# Altium PCB chipshouter-pico.PcbDoc (part 2 of 2)
Units mm, origin at the board's own origin, x right, y up, seen from the top; angles counter-clockwise.
Board outline 40 x 116 mm, 2 copper layers (Top Layer, Bottom Layer); 44 components, 36 nets, 230 pads, 5 vias.
Unrouted connection lines stored in the file: 2.
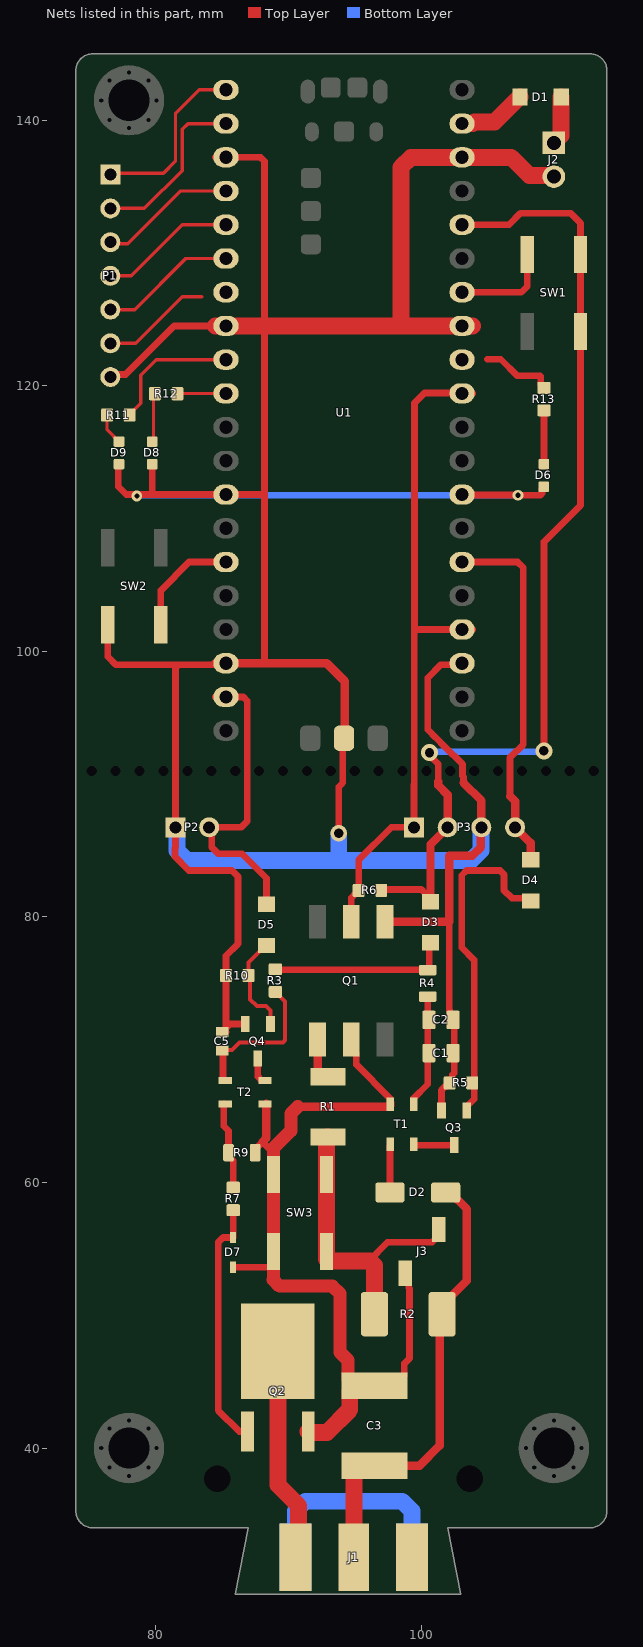
[diagram p2: the nets of this part, all layers, seen from the top]

## Part data
C1 C2: library part CCHIP-4u7-0805-50V, "4u7, 50V, 0805, Ceramic", Case-EIA=0805, Case-Metric=1608, Manufacture 1="TDK Corporation", Manufacture Part Number 1=C2012X5R1H475K125AB, Rated Voltage=50VDC, Supplier Part Number 1=445-5980-1-ND, Temperature Range="-55C to 85C", Tolerance=10%, Component Group=Capacitor, Component Type=Standard, Mounting Technology=SMT, Part Number=CCHIP-4u7-0805-50V, Pin Count=2, RoHS=Yes, Supplier 1=Digi-Key
C3: library part CKG57NX7T2J105M500JH, "1uF, 630V, X7T, Stacked", Case-EIA=2220, Case-Metric=5750, Manufacture 1="TDK Corporation", Manufacture Part Number 1=KRM55TR72J474MH01K, Rated Voltage=630V, Supplier Part Number 1=445-7110-1-ND, Tolerance=+22/-30, Component Group=Capacitor, Component Type=Standard, ComponentLink1Description="Tech Spec Page", ComponentLink1URL=https://product.tdk.com/en/search/capacitor/ceramic/mlcc/info?part_no=CKG57NX7T2J105M500JJ, Part Number=KRM55TR72J474MH01K, Pin Count=2, Supplier 1=Digi-Key
C5: library part CCHIP-100n-0603, "100n, 0603", Case-EIA=0603, Case-Metric=1608, Manufacture 1=Kemet, Manufacture Part Number 1=C0603C104K5RACTU, Rated Voltage=50VDC, Supplier Part Number 1=399-5089-2-ND, Component Group=Capacitor, Component Type=Standard, Mounting Technology=SMT, Part Number=CCHIP-100n-0603, Pin Count=2, Supplier 1=Digi-Key
D1 D3 D4 D5: "SCHOTTKY 30V SOD-123FL", Manufacture 1="SMC Diode Solutions", Supplier Part Number 1=1655-1926-1-ND, Component Group=Diode, Component Type=Standard, Manufacture Part Number 1=DSS13UTR, Mounting Technology=SMT, Part Number=DSS13UTR, Pin Count=2, PP Material Stack=0, PP Rotation=0, RoHS=Yes, Supplier 1=Digi-Key
D2: "600V, 2A, Fast Recovery Diode", Manufacture 1="On Semi", Rated Power=2A, Rated Voltage=600V, Supplier Part Number 1=MURA160T3GOSCT-ND, Temperature Range="-65C to 175C", Component Group=Diode, Component Type=Standard, Manufacture Part Number 1=MURA160T3G, Mounting Technology=SMT, Part Number=MURA160T3G, Pin Count=2, RoHS=Yes, Supplier 1=Digi-Key
D6 D9: library part LEDCHIP_0603_RED, "Chip LED, Red", Manufacture 1=Kingbright, Manufacture Part Number 1=APT1608SRCPRV, Supplier Part Number 1=754-1122-1-ND, Component Group=Optical, Component Type=Standard, Mounting Technology=SMT, Part Number=LEDCHIP_0603_RED, Pin Count=2, PP Material Stack=15, PP Rotation=-90, Supplier 1=Digi-Key
D7: library part PDZ10B, "DIODE ZENER 10V 400MW SOD323", Manufacture 1="On Semiconductor", Rated Power=0.4W, Rated Voltage=10V, Tolerance=2%, Component Group=Diode, Component Type=Standard, Manufacture Part Number 1=MM3Z18VB, Mounting Technology=SMT, Part Number=MM3Z18VB, Pin Count=2, PP Material Stack=0, PP Rotation=0, RoHS=Yes, Supplier 1=Digi-Key, Supplier 2=Mouser, Supplier Part Number 2=771-PDZ10B115
D8: library part LEDCHIP_0603_GREEN, "Chip LED, Green", Manufacture 1=Kingbright, Manufacture Part Number 1=APT1608CGCK, Supplier Part Number 1=754-1116-1-ND, Component Group=Optical, Component Type=Standard, Mounting Technology=SMT, Part Number=LEDCHIP_0603_GREEN, Pin Count=2, PP Material Stack=16, PP Rotation=-90, Supplier 1=Digi-Key
J1: library part CON-F-SMA-PCBEDGE-003.062, "SMA MaleEdge Mount Connector for 0.062\" Thick Board", Manufacture 1="Linx Technologies", Manufacture Part Number 1=CONSMA013.062, Supplier Part Number 1=CONSMA013.062-ND, Component Group=Connector, Component Type=Standard, ComponentLink1Description="Manufacturer URL", ComponentLink1URL=http://www.linxtechnologies.com/, ComponentLink2Description=Datasheet, ComponentLink2URL=http://www.connectorcity.com/diagrams/SMA/CONSMA003.062.pdf, Part Number=CON-F-SMA-PCBEDGE-003.062, Pin Count=5, Supplier 1=Digi-Key
J2: library part Molex_2_Pin, "CONN HEADER 2POS .100 VERT TIN", Manufacture 1=Molex, Manufacture Part Number 1="22-23-2021 / 22-23-2021", Supplier Part Number 1=WM4200-ND, Component Group=Connector, Component Type=Standard, Mounting Technology=Through-hole, Part Number=Molex_2_Pin, Pin Count=2, PP Material Stack=0, PP Rotation=0, RoHS=Yes, Supplier 1=Digi-Key
J3: "2-Pin SMD, Female Header, 0.1\" spacing", Manufacture 1=GCT, Component Group=Connector, Component Type=Standard, Manufacture Part Number 1=BG306-02-A-2-0400-L-G, Part Number=BG306-02-A-2-0400-L-G, Pin Count=2, PP Material Stack=0, PP Rotation=0, PP Rotation1=0, Supplier 1=Digi-Key
MH1 MH2 MH3: library part MOUNT_M3_TIGHT, "Machine screw M3 Mounting Hole", Component Group=Mechanical, Component Type=Mechanical, Part Number=MOUNT_M3_TIGHT, Pin Count=1, PP Material Stack=0, PP Rotation=0
P1: "Header, 7-Pin", LatestRevisionDate=17-Jul-2002, LatestRevisionNote="Re-released for DXP Platform.", Publisher="Altium Limited"
P2: "Header, 2-Pin", LatestRevisionDate=17-Jul-2002, LatestRevisionNote="Re-released for DXP Platform.", Publisher="Altium Limited"
P3: "Header, 4-Pin", LatestRevisionDate=17-Jul-2002, LatestRevisionNote="Re-released for DXP Platform.", Publisher="Altium Limited"
Q1: "Phototransistor", Manufacturer_Name="IXYS SEMICONDUCTOR", Mouser Part Number=849-LDA111STR, Arrow Part Number=LDA111STR, Arrow Price/Stock=https://www.arrow.com/en/products/lda111str/ixys, Datasheet Link=https://datasheet.datasheetarchive.com/originals/dk/DKDS-13/255385.pdf, Height=4.699mm, Manufacturer_Part_Number=LDA111STR, Mouser Price/Stock=https://www.mouser.co.uk/ProductDetail/IXYS-Integrated-Circuits/LDA111STR?qs=lQlU%252BwB40guZJ8WaenQLCg%3D%3D
Q2: library part IRLR120TRPBF, "MOSFET N-CH 100V 7.7A DPAK", Manufacture 1="Vishay Siliconix", Rated Voltage=100V, Supplier Part Number 1=IRLR120TRPBFCT-ND, Component Group=MOSFET, Component Type=Standard, Manufacture Part Number 1=IRLR120TRPBF, Mounting Technology=SMT, Part Number=IRLR120TRPBF, Pin Count=3, RoHS=Yes, Supplier 1=Digi-Key
Q3 Q4: library part DMN3200U-7, "MOSFET N-CH 30V 2.2A SOT23-3", Manufacture 1="Diodes Inc.", Rated Power=3A, Rated Voltage=30V, Supplier Part Number 1=DMN3200U-7DICT-ND, Component Group=MOSFET, Component Type=Standard, Manufacture Part Number 1=DMN3200U-7, Mounting Technology=SMT, Part Number=DMN3200U-7, Pin Count=3, PP Material Stack=0, PP Rotation=0, RoHS=Yes, Supplier 1=Digi-Key
R1: library part RCHIP-20M-2010, "20M, 2010, 1%", Case-EIA=2010, Case-Metric=5025, Manufacture 1=Vishay, Manufacture Part Number 1=CRMA2010AF20M0FKEF, Rated Power=0.5W, Rated Voltage=400VDC, Temperature Range="-55C to 155C", Tolerance=1%, Component Group=Resistor, Component Type=Standard, Mounting Technology=SMT, Part Number=RCHIP-20M-2010, Pin Count=2, Supplier 1=Digi-Key
R2: library part RCHIP-300K-2512, "300K res, 2512, 1%, 3W", Case-EIA=2512, Case-Metric=6432, Manufacture 1="TE Connectivity", Manufacture Part Number 1=3522300KFT, Rated Power=3W, Rated Voltage=250V, Supplier Part Number 1=A121215CT-ND, Temperature Range="-55C to 155C", Tolerance=1%, Component Group=Resistor, Component Type=Standard, Mounting Technology=SMT, Part Number=RCHIP-300K-2512, Pin Count=2, RoHS=Yes, Supplier 1=Digi-Key
R3 R7: library part RCHIP-10R-0603, "10R res, 0603, 1%, 1/10W", Case-EIA=0603, Case-Metric=1608, Manufacture 1=Yageo, Manufacture Part Number 1=RC0603FR-0710RL, Rated Power=0.1W, Rated Voltage=75VDC, Supplier Part Number 1=311-10.0HRCT-ND, Temperature Range="-55C to 155C", Tolerance=1%, Component Group=Resistor, Component Type=Standard, Mounting Technology=SMT, Part Number=RCHIP-10R-0603, Pin Count=2, Supplier 1=Digi-Key
R4: library part RCHIP-75R-0805, "75R res, 0805, 1%, 1/8W", Case-EIA=0805, Manufacture 1=Yageo, Manufacture Part Number 1=RC0805FR-0775RL, Rated Power=0.125W, Rated Voltage=75VDC, Supplier Part Number 1=311-75.0CRCT-ND, Temperature Range="-55C to 155C", Tolerance=1%, Component Group=Resistor, Component Type=Standard, Mounting Technology=SMT, Part Number=RCHIP-75R-0805, Pin Count=2, Supplier 1=Digi-Key
R5 R10 R11 R12 R13: library part RCHIP-1K-0603, "1k res, 0603, 1%, 1/10W", Case-EIA=0603, Case-Metric=1608, Manufacture 1=Yageo, Manufacture Part Number 1=RC0603FR-071KL, Rated Power=0.1W, Rated Voltage=75VDC, Supplier Part Number 1=311-1.00KHRCT-ND, Temperature Range="-55C to 155C", Tolerance=1%, Component Group=Resistor, Component Type=Standard, Mounting Technology=SMT, Part Number=RCHIP-1K-0603, Pin Count=2, Supplier 1=Digi-Key
R6: library part RCHIP-22K-0603, "22k res, 0603, 1%, 1/10W", Case-EIA=0603, Case-Metric=1608, Manufacture 1=Yageo, Manufacture Part Number 1=RC0603FR-0722KL, Rated Power=0.1W, Rated Voltage=75VDC, Supplier Part Number 1=311-22.0KHRCT-ND, Temperature Range="-55C to 155C", Tolerance=1%, Component Group=Resistor, Component Type=Standard, Mounting Technology=SMT, Part Number=RCHIP-22K-0603, Pin Count=2, Supplier 1=Digi-Key
R9: library part RCHIP-75R-0805, Case-EIA=0805, Manufacture 1=Yageo, Manufacture Part Number 1=RC0805FR-0775RL, Rated Power=0.125W, Rated Voltage=75VDC, Supplier Part Number 1=311-75.0CRCT-ND, Temperature Range="-55C to 155C", Tolerance=1%, Component Group=Resistor, Component Type=Standard, Mounting Technology=SMT, Part Number=RCHIP-75R-0805, Pin Count=2, Supplier 1=Digi-Key
SW1 SW2 SW3: library part TACTSW-KSC741J, "SWITCH TACTILE SPST-NO 0.01A 32V", Manufacture 1=C&K, Supplier Part Number 1=CKN10309CT-ND, Component Group=Switch, Component Type=Standard, Manufacture Part Number 1="KSC741J LFS", Mounting Technology=SMT, Part Number=TACTSW-KSC741J, Pin Count=4, PP Material Stack=0, PP Rotation=0, RoHS=Yes, Supplier 1=Digi-Key
T1 T2: library part ATB322524_PROTO, "HV Transformer 1:10, Small", Manufacture 1=TDK, Component Group=Inductor, Component Type=Standard, Manufacture Part Number 1=ATB322524, Mounting Technology=SMT, Part Number=ATB322524_PROTO, Pin Count=4, RoHS=Yes, Supplier 1=Mouser
U1: "Raspberry Pi Pico", Package=None, Availability="In Stock", Check_prices=https://www.snapeda.com/parts/SC0915/Raspberry%20Pi/view-part/6331605/?ref=eda, Component Group="PCB Feature", Component Type=Standard, MF="Raspberry Pi", MP=SC0915, Part Number=SC0915, PP Material Stack=0, PP Rotation=0, PP Rotation1=0, Price=None, Purchase-URL=https://pricing.snapeda.com/search/part/SC0915/?ref=eda, SnapEDA_Link=https://www.snapeda.com/parts/SC0915/Raspberry%20Pi/view-part/6331605/?ref=snap

## Free pads (board coordinates)
  round 0 hole 2 unplated: 8(84.651,37.7) 9(103.65,37.7)
  round 0 hole 0.762 unplated: 10(75.2,91) 10(77,91) 10(78.8,91) 10(80.6,91) 10(82.4,91) 10(84.2,91) 10(86,91) 10(87.8,91) 10(89.6,91) 10(91.4,91) 10(93.2,91) 10(95,91) 10(96.8,91) 10(98.6,91) 10(100.4,91) 10(102.2,91) 10(104,91) 10(105.8,91) 10(107.6,91) 10(109.4,91) 10(111.2,91) 10(113,91)

## Via types
v1: diameter 1.27, hole 0.711, Top Layer to Bottom Layer, tented both sides, 3 vias
v2: diameter 0.8, hole 0.4, Top Layer to Bottom Layer, tented both sides, 2 vias

## Nets (pads, with @x,y where several pads share a name; then routed paths per layer and width w, separated by ;. In a path a pad name is that pad's centre, name@x,y a point inside that pad or via, vN(x,y) a via of type N, cw(c..) or ccw(c..) an arc to the next point about the centre after c; other vN are vias at no path point)
CHARGED: P3.1 Q1.5 R6.2 U1.24 U1.31 | length 50.7
  Top Layer w0.508: Q1.5@94.742,79.629 94.742,81.442 R6.2@95.054,81.754 ; R6.2@95.3,82 95.3,84.3 97.75,86.75 P3.1@99.46,86.75 99.46,89.967 99.489,89.997 99.489,101.647 U1.24@103.886,101.647 ; 99.5,101.75 99.5,118.699 100.254,119.452 103.861,119.452 U1.31@103.886,119.427
GND: C1.2 C2.2 C5.2 D6.K D8.K D9.K J2.2 P1.7 P2.1 P3.3 Q1.4 Q3.2 Q4.2 R5.2 R10.2 SW2.1 U1.3 U1.8 U1.13 U1.18 U1.23 U1.28 U1.33 U1.38 U1.D2 | length 286.5
  Top Layer w0.508: SW2.1@76.4,102 76.406,101.994 76.406,99.594 77,99 81.75,99 ; P1.7@76.6,120.66 76.79,120.85 77.75,120.85 81.407,124.507 U1.8@84.506,124.507 ; D9.K@77.25,114.1 77.2,114.05 77.2,112.4 77.793,111.807 79.8,111.807 ; D8.K@79.75,114.1 79.75,111.857 79.8,111.807 ; U1.18@84.506,99.107 84.399,99 81.75,99 ; U1.3@84.506,137.207 87.902,137.207 88.2,136.909 88.2,124.507 ; C5.2@85.014,71.337 C5.2@85.307,71.337 ; Q4.2@86.756,71.937 85.614,71.937 85.307,71.63 R10.2@85.307,75.59 85.307,77.077 86.208,77.978 86.208,83.042 85.75,83.5 82.5,83.5 81.46,84.54 81.46,85.198 81.5,85.238 P2.1@81.5,86.75 81.5,98.75 81.75,99 ; 88.2,99.107 88.2,111.807 ; 88.2,124.21 88.2,111.807 ; v1(93.8,86.3) 93.8,89.8 94.1,90.1 94.1,93.361 U1.D2@94.196,93.457 ; Q3.2@101.539,65.435 101.539,66.956 101.837,67.254 101.954,67.254 101.975,67.275 101.975,67.725 102.325,67.725 102.346,67.746 102.346,68.096 102.5,68.25 102.5,72.25 102.154,72.596 102.154,72.969 102.129,72.994 102.129,79.629 ; U1.23@102.445,99 101.5,99 100.5,98 100.5,94.116 101.101,93.516 101.105,93.516 101.775,92.846 101.775,92.841 103.111,91.505 103.111,90.632 103.2,90.543 103.2,90.1 ; U1.28@103.886,111.807 103.915,111.778 107.271,111.778 v2(107.3,111.75) ; 105,111.75 v2(107.3,111.75) ; D6.K@109.25,112.4 109.104,112.254 109.104,111.902 108.952,111.75 v2(107.3,111.75) ; 79.8,111.807 84.506,111.807 88.2,111.807
  Top Layer w0.635: U1.18@84.506,99.107 88.2,99.107 92.893,99.107 94.25,97.75 94.25,93.511 U1.D2@94.196,93.457 ; Q1.4@97.282,79.629 102.129,79.629 102.129,84.621 103.871,84.621 104.5,85.25 104.5,86.71 P3.3@104.54,86.75 104.54,88.76 103.2,90.1
  Top Layer w1.27: U1.8@84.506,124.507 88.2,124.507 98.593,124.507 ; U1.33@103.886,124.507 98.593,124.507 ; J2.2@110,135.75 109.918,135.832 108.168,135.832 106.793,137.207 103.886,137.207 99.244,137.207 98.5,136.463 98.5,124.6 98.593,124.507
  Bottom Layer w0.508: v2(78.6,111.7) 78.65,111.75 v2(107.3,111.75)
  Bottom Layer w1.27: P2.1@81.5,86.75 81.615,86.635 81.615,84.994 82.359,84.25 93.8,84.25 ; v1(93.8,86.3) 93.8,84.25 ; P3.3@104.54,86.75 104.5,86.71 104.5,84.994 103.756,84.25 93.8,84.25
HVPULSE: D5.A P2.2 U1.19 | length 23.3
  Top Layer w0.508: U1.19@84.506,96.567 86.614,96.567 86.9,96.281 86.9,87.198 86.452,86.75 84.23,86.75 P2.2@84.04,86.75 84.23,86.56 84.23,85.27 84.75,84.75 86.533,84.75 88.367,82.917 D5.A@88.367,80.95
HVPWM: D4.A P3.4 U1.26 | length 27
  Top Layer w0.508: U1.26@103.886,106.727 107.273,106.727 107.7,106.3 107.7,93 106.7,92 106.7,89.1
  Top Layer w0.635: 106.7,89.1 107.08,88.72 P3.4@107.08,86.75 108.25,85.58 D4.A@108.25,84.3
NetC1_1: C1.1 C2.1 R4.2 T1.4 | length 8.5
  Top Layer w0.508: T1.4@99.437,65.989 99.437,66.339 100.5,67.402 100.5,69 100.5,71.25 100.5,72.25 R4.2@100.5,74
NetC3_1: C3.1 D2.K J1.1 R2.2 | length 34.8
  Top Layer w0.305: D2.K@101.448,58.848 D2.K@101.85,59.25
  Top Layer w0.635: C3.1@96.495,38.681 99.895,38.681 101.397,40.183 101.397,49.901 R2.2@101.585,50.089 101.585,50.739 103.454,52.608 103.454,57.996 102.2,59.25 D2.K@101.85,59.25
  Top Layer w1.27: J1.1@94.934,32.131 94.945,32.143 94.945,38.316 95.31,38.681 C3.1@96.495,38.681
NetC3_2: C3.2 D7.A J3.1 Q1.2 Q2.2 R9.2 SW3.1 SW3.4 T1.3 T2.2 | length 66.9
  Top Layer w0.508: D7.A@85.852,53.612 SW3.1@88.856,53.612 ; R9.2@87.5,62.25 87.5,62.5 88.065,63.065 88.635,62.495 88.635,60.855 SW3.4@88.881,60.609 ; Q1.2@94.742,70.124 95.123,69.743 95.123,68.883 97.667,66.339 T1.3@97.667,65.989 ; C3.2@96.495,44.681 97.995,44.681 98.741,45.427 98.741,46.366 99.136,46.761 99.136,51.994 99.062,52.068 99.062,52.908 J3.1@98.806,53.164
  Top Layer w0.635: 88.065,63.065 88.341,63.341 T2.2@88.341,65.917 ; 90.72,65.7 97.584,65.7 97.667,65.783 T1.3@97.667,65.989
  Top Layer w1: 90.72,65.7 90.2,65.18 90.2,63.9 88.881,62.581 SW3.4@88.881,60.609 SW3.1@88.881,54.809 88.881,52.698 88.856,52.673 89.329,52.2 93.314,52.2 93.9,51.614 93.9,47.2 94.495,46.605 94.495,45.181 94.995,44.681 C3.2@96.495,44.681
  Top Layer w1.27: Q2.2@91.491,41.25 91.567,41.173 92.913,41.173 94.63,42.89 94.63,44.316 C3.2@94.995,44.681
NetC5_1: C5.1 R3.2 T2.4 | length 11.4
  Top Layer w0.305: C5.1@85.014,69.937 85.067,69.991 85.767,69.991 86.312,70.536 89.585,70.536 89.764,70.714 89.764,73.623 89.375,74.012 89.375,74.062 89.077,74.359 R3.2@89.027,74.359
  Top Layer w0.508: C5.1@85.071,69.937 C5.1@85.014,69.937 85.077,69.874 85.077,67.751 T2.4@85.141,67.687
NetD1_A: D1.A J2.1 | length 3.9
  Top Layer w1.27: J2.1@109.83,138.12 J2.1@110,138.29 110.55,138.84 D1.A@110.55,141.75
NetD1_K: D1.K U1.39 | length 4.4
  Top Layer w1.27: U1.39@103.886,139.747 104.013,139.874 105.529,139.874 107.405,141.75 D1.K@107.45,141.75
NetD2_A: D2.A T1.2 | length 3.7
  Top Layer w0.508: D2.A@97.554,59.154 D2.A@97.65,59.25 97.667,59.267 T1.2@97.667,62.789
NetD3_K: D3.K R3.1 R4.1 | length 13.6
  Top Layer w0.508: R3.1@89.027,76.059 89.057,76.03 100.47,76.03 R4.1@100.5,76 100.605,76.105 100.605,77.947 D3.K@100.711,78.053
NetD4_K: D4.K Q3.1 R5.1 | length 25.7
  Top Layer w0.508: Q3.1@103.439,65.435 103.439,65.71 104,66.271 104,76.762 103.063,77.699 103.063,83.139 103.425,83.5 105.952,83.5 106.25,83.202 106.25,82 106.838,81.412 108.038,81.412 D4.K@108.25,81.2 108.175,81.2 D4.K@107.975,81
NetD5_K: D5.K Q4.1 R10.1 | length 7.6
  Top Layer w0.305: D5.K@88.367,77.85 88.292,77.85 87.007,76.566 R10.1@87.007,75.59 87.122,75.475 87.122,73.787 87.63,73.279 88.316,73.279 88.656,72.939 Q4.1@88.656,71.937
NetD6_A: D6.A R13.1 | length 4.1
  Top Layer w0.508: D6.A@109.25,114.1 R13.1@109.25,118.15
NetD7_K: D7.K Q2.1 R7.2 | length 18.9
  Top Layer w0.508: R7.2@85.852,57.914 D7.K@85.852,55.862 85.097,55.862 84.716,55.481 84.716,42.843 86.309,41.25 Q2.1@86.931,41.25
NetD8_A: D8.A R12.1 | length 3.7
  Top Layer w0.254: D8.A@79.75,115.8 79.85,115.9 79.85,119.3 R12.1@79.95,119.4
NetD9_A: D9.A R11.1 | length 2.4
  Top Layer w0.254: R11.1@76.3,117.75 R11.1@76.35,117.8 76.35,116.7 D9.A@77.25,115.8
NetJ1_2: J1.2 J1.3 J1.4 J1.5 Q2.3 | length 32.3
  Top Layer w1.27: Q2.3@89.211,47.3 89.211,37.23 90.78,35.662 90.78,32.36 J1.2@90.551,32.131
  Bottom Layer w1.27: J1.3@90.537,31.775 90.537,35.256 91.281,36 98.558,36 99.302,35.256 J1.4@99.302,31.775
NetJ3_2: J3.2 R1.2 R2.1 SW3.2 SW3.3 | length 28.2
  Top Layer w0.508: SW3.2@92.856,54.809 SW3.3@92.856,59.694 ; 96.063,54.102 97.46,55.499 100.821,55.499 101.346,56.024 J3.2@101.346,56.464
  Top Layer w1.27: R1.2@93,63.425 92.896,63.425 92.881,63.41 SW3.3@92.881,60.609 SW3.2@92.881,54.809 92.881,54.237 93.016,54.102 96.063,54.102 96.139,54.102 96.485,53.756 R2.1@96.485,50.089
NetP1_1: P1.1 U1.1 | length 12.7
  Top Layer w0.254: P1.1@76.6,135.9 76.7,136 80.6,136 81.5,136.9 81.5,140.5 83.287,142.287 U1.1@84.506,142.287
NetP1_2: P1.2 U1.2 | length 12.4
  Top Layer w0.254: P1.2@76.6,133.36 79.16,133.36 82.008,136.208 82.008,139.308 82.447,139.747 U1.2@84.506,139.747
NetP1_3: P1.3 U1.4 | length 9.6
  Top Layer w0.254: P1.3@76.6,130.82 76.72,130.7 77.9,130.7 81.867,134.667 U1.4@84.506,134.667
NetP1_4: P1.4 U1.5 | length 9.5
  Top Layer w0.254: P1.4@76.6,128.28 78.18,128.28 82.027,132.127 U1.5@84.506,132.127
NetP1_5: P1.5 U1.6 | length 9.5
  Top Layer w0.254: P1.5@76.6,125.74 78.44,125.74 82.287,129.587 U1.6@84.506,129.587
NetP1_6: P1.6 U1.7 | length 8.3
  Top Layer w0.254: P1.6@76.6,123.2 78.5,123.2 82,126.7 83.5,126.7
NetQ1_1: Q1.1 R1.1 | length 3.4
  Top Layer w0.635: Q1.1@92.202,70.779 92.202,68.308 92.535,67.975 R1.1@93,67.975
NetQ3_3: Q3.3 T1.1 | length 3.1
  Top Layer w0.508: T1.1@99.437,62.789 99.46,62.812 102.466,62.812 Q3.3@102.489,62.835
NetQ4_3: Q4.3 T2.1 | length 2.1
  Top Layer w0.508: Q4.3@87.706,69.337 87.706,67.972 87.991,67.687 T2.1@88.341,67.687
NetR7_1: R7.1 R9.1 T2.3 | length 6.6
  Top Layer w0.508: T2.3@85.141,65.917 85.141,64.259 85.5,63.9 R9.1@85.5,62.25 85.5,62 85.852,61.648 R7.1@85.852,59.614
NetR11_2: R11.2 U1.9 | length 9.4
  Top Layer w0.254: R11.2@78.05,117.8 78.05,117.85 78.9,118.7 78.9,120.8 80.067,121.967 U1.9@84.506,121.967
NetR12_2: R12.2 U1.10 | length 2.9
  Top Layer w0.254: R12.2@81.65,119.4 81.667,119.417 84.496,119.417 U1.10@84.506,119.427
NetR13_2: R13.2 U1.32 | length 5.5
  Top Layer w0.508: 105,122 106,122 107.25,120.75 108.952,120.75 109.004,120.698 109.004,120.046 109.2,119.85 R13.2@109.25,119.85
NetSW1_4: SW1.4 U1.34 | length 6.7
  Top Layer w0.508: U1.34@103.886,127.047 107.547,127.047 108,127.5 SW1.4@108,129.9
NetSW2_2: SW2.2 U1.15 | length 7.6
  Top Layer w0.508: SW2.2@80.4,102 80.4,104.6 82.527,106.727 U1.15@84.506,106.727
VCC: D3.A P3.2 R6.1 SW1.2 SW1.3 U1.36 | length 75
  Top Layer w0.508: R6.1@97,82 97.062,82.062 100.017,82.062 100.315,81.765 100.315,81.474 100.636,81.153 D3.A@100.711,81.153 ; v1(100.632,92.373) 100.632,92.167 101.3,91.499 101.3,90.2 ; U1.36@103.886,132.127 106.627,132.127 107.5,133 111.25,133 112,132.25 112,111 109.25,108.25 v1(109.25,92.5)
  Top Layer w0.635: D3.A@100.711,81.153 100.711,85.461 P3.2@102,86.75 102,89.2 101.3,89.9 101.3,90.2
  Bottom Layer w0.508: v1(100.632,92.373) 100.696,92.436 109.186,92.436 v1(109.25,92.5)
pads on no net: C1.0 C2.0 D2.0 D6.0 D8.0 D9.0 MH1.1 MH2.1 MH3.1 Q1.3 Q1.6 R3.0 R4.0 R5.0 R6.0 R7.0 R9.0 R10.0 R11.0 R12.0 R13.0 SW1.1 SW2.3 SW2.4 U1.11 U1.12 U1.14 U1.16 U1.17 U1.20 U1.21 U1.22 U1.25 U1.27 U1.29 U1.30 U1.35 U1.37 U1.40 U1.A U1.B U1.C U1.D U1.D1 U1.D3 U1.TP1 U1.TP2 U1.TP3 U1.TP4 U1.TP5 U1.TP6

## Silkscreen, mask and mechanical layers (free items; w line width, h text height)
Top Overlay:
  lines w0.2: 89.5,76.9 89.9,77.3 89.9,82.7
  lines w0.508: 83.82,66.802 90.576,66.802 90.576,68.453 90.576,75.209 98.958,75.209 98.958,67.666 98.577,67.666 98.577,61.265 104.521,61.265 104.521,61.316
  text "+" at 111.3,137.8 h1.78
  text "-" at 111.4,135.4 h1.78
  text "GP0" at 78.33,135.26 h0.9
  text "GP1" at 78.33,132.72 h0.9
  text "ARM" at 107.5,132 h2.54
  text "GP2" at 78.33,130.18 h0.9
  text "GP3" at 78.33,127.64 h0.9
  text "GP4" at 78.33,125.1 h0.9
  text "GP5" at 78.33,122.56 h0.9
  text "GND" at 79.2,119.3 h0.76 r90
  text "H.V." at 76.4,113.2 h1.78 r90
  text "STATUS" at 82.6,111.5 h1.78 r90
  text "ARMING" at 111.6,110.1 h1.78 r90
  text "PULSE" at 74.8,109.7 h2.54
  text "Raspberry Pi Pico Goes Right Here!" at 95.9,97.7 h1.27 r90
  text "GND" at 82,88.1 h0.76 r90
  text "HVP" at 84.6,88.1 h0.76 r90
  text "CHG" at 100.08,88.1 h0.76 r90
  text "VCC" at 102.62,88.1 h0.76 r90
  text "GND" at 105.1,88.1 h0.76 r90
  text "PWM" at 107.7,88.1 h0.76 r90
  text "m" at 90.094,81.407 h3.81
  text "picoemp.com" at 78.5,73 h2.54 r90
  text "TM" at 75.9,71.2 h0.8 r90
  text "DISCHARGE" at 94.805,61.995 h1.27 r270
  text "HOLD 5S" at 86.805,51.605 h1.27
  text "ChipSHOUTER®-PicoEMP" at 78,44 h2.54 r90
  text "Designed by Colin O'Flynn. Built by You." at 81,44 h1.27 r90
  text "DANGER: HIGH VOLTAGE UNDER SHIELD" at 109.5,44 h1.27 r90
  text "USE ONLY AFTER CONSULTING FULL PRODUCT DOCUMENTATION AT WWW.PICOEMP.COM. THE PRODUCT IS PROVIDED \"AS IS\", WITHOUT WARRANTY OF ANY KIND." at 112.5,44 h0.64 r90
  text "m" at 99.416,43.713 h3.81
  text "HIGH / VOLTAGE" at 85.954,35.255 h1.27
  text "m" at 78.12,34.843 h3
  text "m" at 107.022,34.579 h3
Bottom Overlay:
  text "2x AA Battery" at 108.5,140.25 h0.8 r90
  text "+" at 112.75,137.75 h1
  text "-" at 112.75,135.21 h1
  text "CUT TRACES BEFORE BREAKING" at 99,91.5 h0.64
  text "CUT TRACES BEFORE BREAKING" at 99,89.5 h0.64
  text "GND" at 81,88 h0.76 r270
  text "HVP" at 83.5,88 h0.76 r270
  text "CHG" at 99,88 h0.76 r270
  text "VCC" at 101.5,88 h0.76 r270
  text "GND" at 104,88 h0.76 r270
  text "PWM" at 106.5,88 h0.76 r270
  text "HIGH VOLTAGE" at 101,35 h1.27
  text "m" at 97,30 h3.81
Mechanical 1:
  lines w0.254: 82.327,42.066 82.327,78.833 83.584,78.833 83.584,42.066 82.327,42.066 ; 83.25,79.55 83.25,82.75 84.7,82.75 84.7,79.55 83.25,79.55 ; 103.657,79.566 105.068,79.566 105.068,82.5 103.657,82.5 103.657,79.566 ; 104.766,42.066 106.023,42.066 106.023,78.827 106.017,78.833 104.766,78.833 104.766,42.066
  lines w0.5: 74,35.27 ccw(c75.27,35.27) 75.27,34 83,34 86,34 87,34 86,29 103,29 102,34 106,34 112.73,34 ccw(c112.73,35.27) 114,35.27 114,37
  lines w0.508: 74,35.27 74,143.75 ; 74,143.73 cw(c75.27,143.73) 75.27,145 81,145 112.73,145 cw(c112.73,143.73) 114,143.73 ; 114,37 114,143.75